# Altium PCB Sensor_Box_PWR_Backup.PCBDOC (part 1 of 2)
Units mil, origin at the board's own origin, x right, y up, seen from the top; angles counter-clockwise.
Board outline 1781.68 x 2876.17 mil, 2 copper layers (Top, Bot), stack 61.855 mil thick; 91 components, 72 nets, 274 pads, 117 vias.
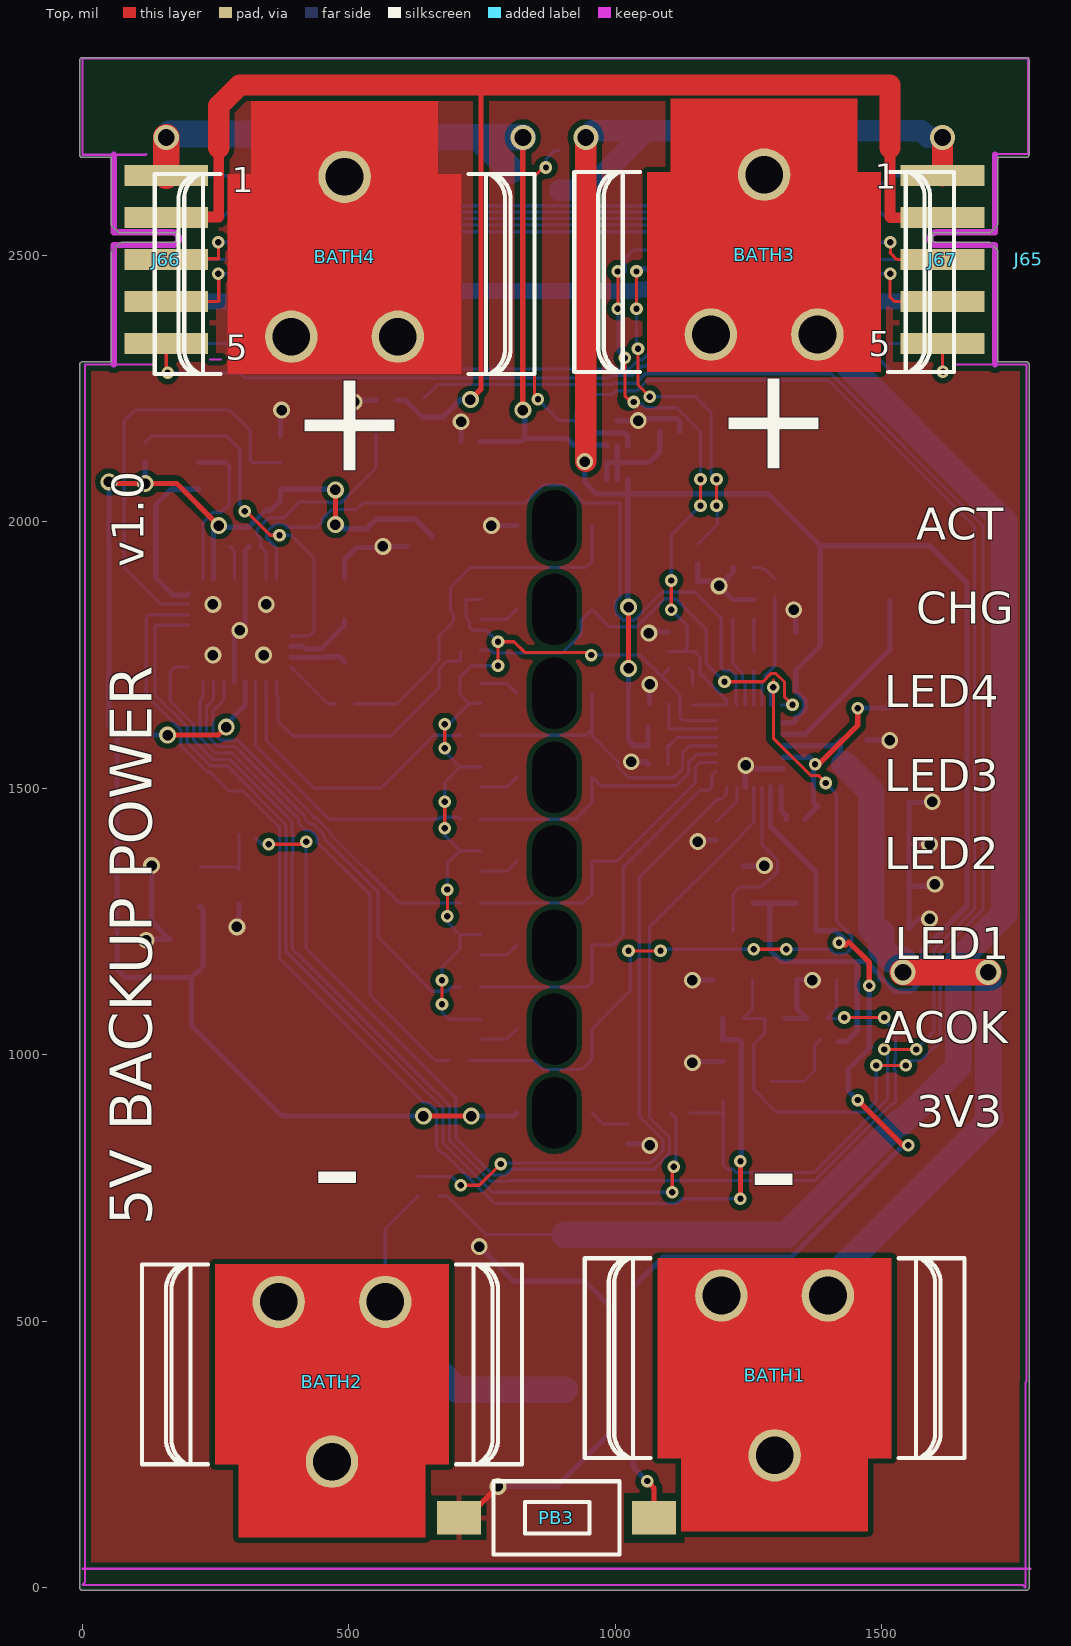
[diagram p0: Top view]
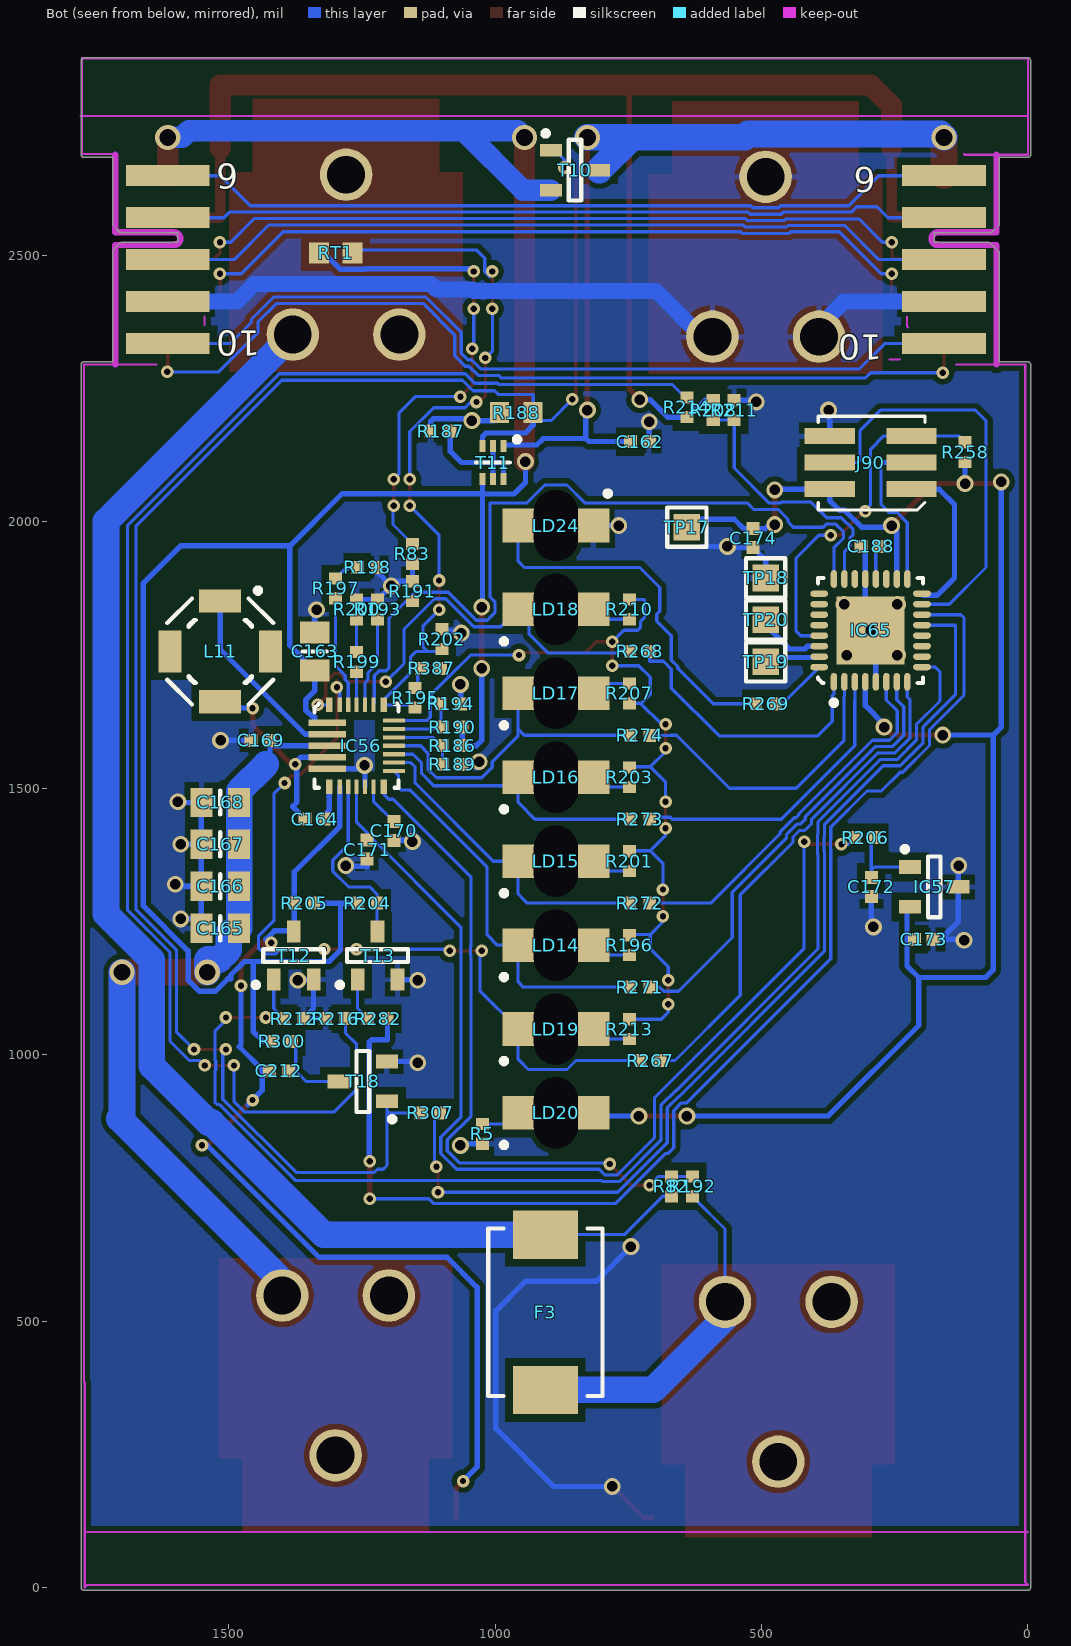
[diagram p1: Bot view, seen from below]
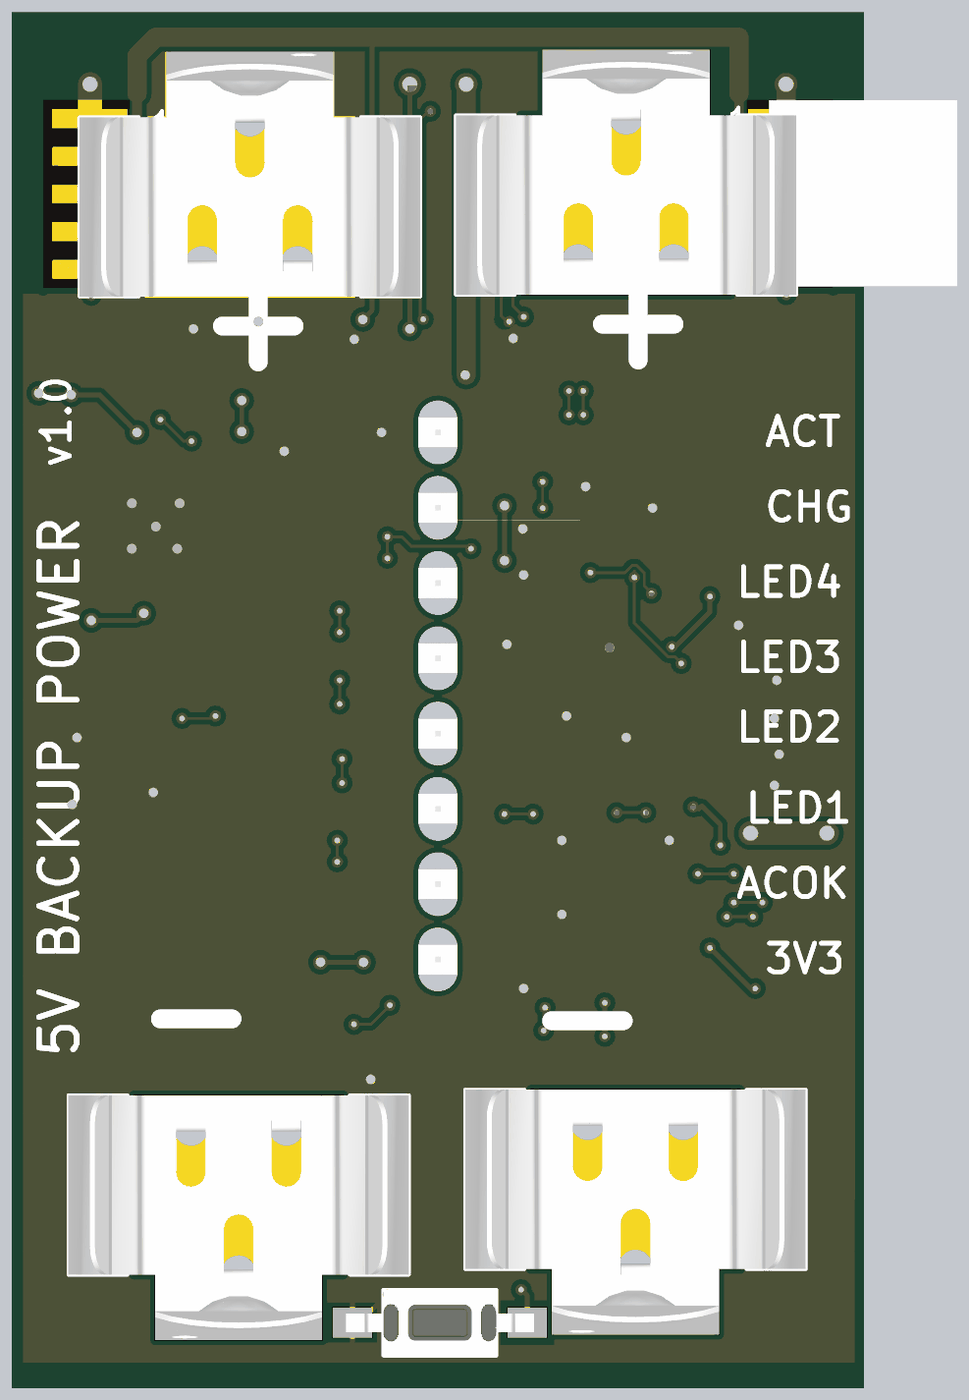
[diagram p2: 3D render of the assembled board from above, using the file's embedded part models]
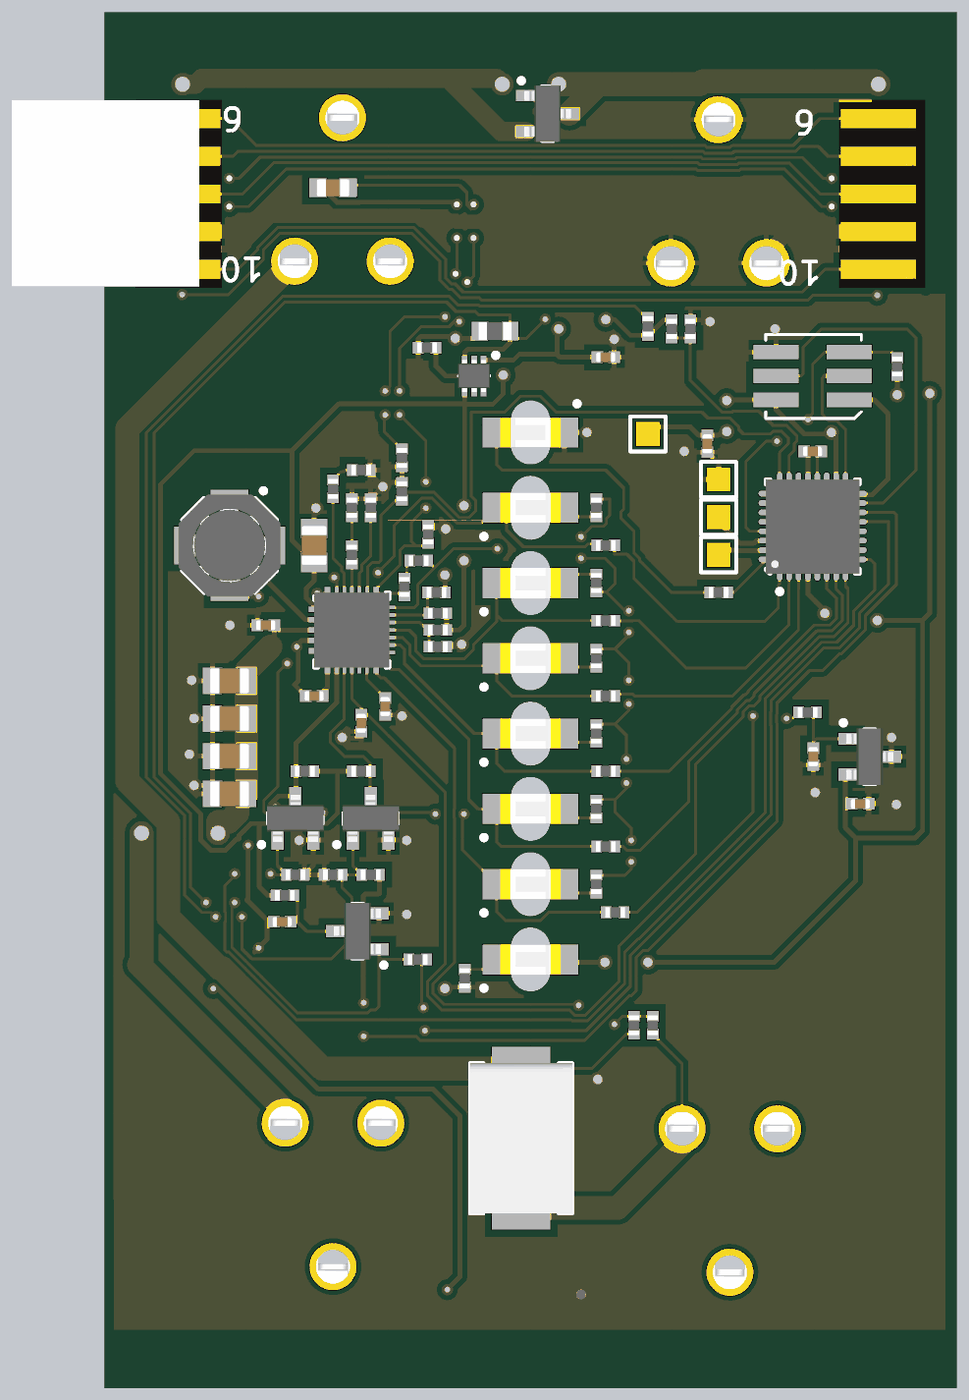
[diagram p3: 3D render of the assembled board from below, using the file's embedded part models]

## Layer stack, top to bottom
TopSolder: solder mask 0.4, Solder Resist, Dk 3.5
Top: signal copper 1.4
Dielectric1: core 59.0551, FR-4, Dk 4.8
Bot: signal copper 1.4
BottomSolder: solder mask 0.4, Solder Resist, Dk 3.5

## Board outline
-5.02,2295.27 cw(c0,2295.27) 0,2300.29 54.04,2300.29 54.04,2503.94 cw(c59.05,2503.94) 55.53,2507.5 55.51,2507.48 71.26,2523.23 71.24,2523.21 cw(c74.8,2519.68) 74.8,2524.7 176.09,2524.7 176.09,2542.23 70.87,2542.23 cw(c70.87,2547.24) 67.3,2543.71 67.32,2543.7 55.51,2555.51 55.53,2555.49 cw(c59.05,2559.05) 54.04,2559.05 54.04,2683.96 0,2683.96 cw(c0,2688.98) -5.02,2688.98 -5.02,2866.14 cw(c0,2866.14) 0.09,2871.15 1771.65,2871.15 cw(c1771.65,2866.14) 1776.67,2866.14 cw(c1771.65,2866.14) 1776.67,2866.06 1776.67,2688.97 cw(c1771.65,2688.97) 1771.65,2683.96 1717.61,2683.96 1717.61,2559.05 cw(c1712.6,2559.05) 1716.13,2555.49 1716.14,2555.51 1704.33,2543.7 1704.35,2543.71 cw(c1700.79,2547.24) 1700.79,2542.23 1595.57,2542.23 1595.57,2524.7 1700.79,2524.7 cw(c1700.79,2519.68) 1704.35,2523.21 1704.33,2523.23 1716.14,2511.42 1716.13,2511.43 cw(c1712.6,2507.87) 1717.61,2507.87 1717.61,2300.29 1771.65,2300.29 cw(c1771.65,2295.27) 1775.2,2298.82 cw(c1771.65,2295.27) 1776.67,2295.27 1776.67,0 cw(c1771.65,0) 1775.43,-3.3 cw(c1771.65,0) 1771.65,-5.02 885.83,-5.02 cw(c885.83,0) 885.74,-5.02 0.04,-5.02 cw(c0,0) -5.02,0

## Design rules (kind name [scope] priority, off if disabled: settings)
Clearance [All] p1: gap=6 ignorepadtopadclearanceinfootprint=FALSE except(10: Arc-Poly Track-Poly THPad-Poly Via-Poly Fill-Poly Poly-Poly Poly-Region Poly-Text Poly-Hole; 15: SMDPad-Poly)
ComponentClearance [All] p1: gap=10 collisioncheckmode=3 verticalgap=0 showdistances=FALSE
DiffPairsRouting [All] p1: maxlimit=10 minlimit=5 mostfreqgap=5 toplayer_minwidth=5 toplayer_maxwidth=15 toplayer_prefwidth=10 bottomlayer_minwidth=5 bottomlayer_maxwidth=15 bottomlayer_prefwidth=10 maxuncoupledlength=500
FabricationTestPointUsage TestPointUsage [All] p1: valid=0 allowmultiple=FALSE
FabricationTestpoint Testpoint [All] p1: side=3 testpointundercomponent=TRUE minsize=40 maxsize=100 preferedsize=60 minholesize=20 maxholesize=40 preferedholesize=32 testpointgrid=1 allowsidetop=TRUE allowsidebottom=TRUE usegrid=TRUE gridtolerance=0.01
HoleSize [All] p1: absolutevalues=TRUE maxlimit=150 minlimit=1 maxpercent=80.000 minpercent=20.000
HoleToHoleClearance [All] p1: gap=1 allowstackedmicrovias=TRUE
MinimumSolderMaskSliver [All] p1: minsoldermaskwidth=0
PlaneClearance [All] p1: clearance=10
PlaneConnect [All] p1: planeconnectstyle=Direct reliefexpansion=20 reliefentries=4 reliefconductorwidth=10 reliefairgap=10
PolygonConnect PolygonConnect_pad [(InPadClass('All Pads'))] p1: connectstyle=Relief reliefconductorwidth=10 reliefentries=4 polygonreliefangle="90 Angle" airgapwidth=10
PolygonConnect [All] p2: connectstyle=Direct reliefconductorwidth=10 reliefentries=4 polygonreliefangle="45 Angle" airgapwidth=10
RoomDefinition Sensor_Box_PWR_Backup [InComponentClass('Sensor_Box_PWR_Backup')] p1 off: confinementstyle=ConfineIn formatcopy=TRUE lockcomponents=FALSE outline 3222.43,601.46 10417.3,601.46 10417.3,1536.49 3222.43,1536.49
RoutingVias RoutingVias_PWR [InNetClass('PWR')] p1: holewidth=31.5 width=47.24 viastyle="Through Hole" minholewidth=19.68 minwidth=31.5 maxholewidth=31.5 maxwidth=47.24
RoutingVias [All] p2: holewidth=11.81 width=23.62 viastyle="Through Hole" minholewidth=11.81 minwidth=23.62 maxholewidth=11.81 maxwidth=23.62
SilkToSilkClearance [All] p1: silktosilkclearance=0
SilkToSolderMaskClearance SilkscreenOverComponentPads [IsPad] p1: minsilkscreentomaskgap=0 clearancetoexposedcopper=TRUE
SolderMaskExpansion [All] p1: expansion=2
Width Width_PWR [InNetClass('PWR')] p1: maxlimit=50 minlimit=10 preferedwidth=20
Width [InNetClass('All Nets')] p2: maxlimit=50 minlimit=6 preferedwidth=10
19 further rules are at their usual default settings.

## Classes and differential pairs
net class PWR: GND P3V3 P5V0i P5V0o P12V0 VH

## Components (designator, comment, footprint, x,y, rotation, side; value= is the part's Value field where it differs from the comment)
BATH1 "=Value" BATH_KEYSTONE_54 1299.21,548.32 r90 top
BATH2 "=Value" BATH_KEYSTONE_54 468.5,536.51 r90 top
BATH3 "=Value" BATH_KEYSTONE_54 1279.53,2351.47 r270 top
BATH4 "=Value" BATH_KEYSTONE_54 492.13,2347.53 r270 top
C162 "100nF" CAPC1005X55N 728.35,2150.68 r180 bottom
C163 "10uF" CAPC2012X135N 1338.58,1756.98 r90 bottom
C164 "100nF" CAPC1005X55N 1338.58,1442.02 r180 bottom
C165 "10uF" CAPC2012X135N 1515.75,1237.3 r0 bottom
C166 "10uF" CAPC2012X135N 1515.75,1316.04 r0 bottom
C167 "10uF" CAPC2012X135N 1515.75,1394.78 r0 bottom
C168 "10uF" CAPC2012X135N 1515.75,1473.52 r0 bottom
C169 "1uF" CAPC1005X55N 1440,1590.01 r0 bottom
C170 "100nF" CAPC1005X55N 1190,1420.01 r270 bottom
C171 "1uF" CAPC1005X55N 1240,1385.01 r270 bottom
C172 "1uF" CAPC1005X55N 293.9,1315.01 r270 bottom
C173 "1uF" CAPC1005X55N 195.48,1216.59 r180 bottom
C174 "100nF" CAPC1005X55N 515.76,1969.6 r90 bottom
C188 "1uF" CAPC1005X55N 295.28,1953.83 r0 bottom
C212 "1uF" CAPC1005X55N 1405.51,969.58 r180 bottom
F3 "3A-6V" FUSR_BOURNS_MF-SM300 905.51,516.83 r270 bottom
IC56 "MP2639AGR" MPS_MP2639AGR 1259.84,1579.82 r180 bottom
IC57 "AP7313-33SAG-7" SOT95P240X130-3N 175.79,1315.01 r180 bottom
IC65 "ATMEGA328PB-MU" QFN50P500X500X100-33N-S325 295.28,1796.35 r90 bottom
J65 "=Family" "AVX_00 9159 010 061 916" 1775.59,2493.2 r180 top
J66 "=Family" EDGE10T1B6_P200W1000L0F100X400 157.48,2649.6 r270 top locked
J67 "=Family" EDGE10T5B10_P200W1000L0F100X400 1614.17,2334.64 r90 top locked
J90 "ZL322-2X3P or PLHTD6S-TR-CV" ZL322-2X3P 295.28,2111.31 r90 bottom
L11 "2.2uH" IND_BOURNS_SRU5028 1515.75,1756.98 r270 bottom
LD14 "Green" LED_KINGBRIGHT_KPTR3216 885.83,1205.8 r0 bottom
LD15 "Green" LED_KINGBRIGHT_KPTR3216 885.83,1363.28 r0 bottom
LD16 "Green" LED_KINGBRIGHT_KPTR3216 885.83,1520.76 r0 bottom
LD17 "Green" LED_KINGBRIGHT_KPTR3216 885.83,1678.24 r0 bottom
LD18 "Green" LED_KINGBRIGHT_KPTR3216 885.83,1835.72 r0 bottom
LD19 "Green" LED_KINGBRIGHT_KPTR3216 885.83,1048.32 r0 bottom
LD20 "Green" LED_KINGBRIGHT_KPTR3216 885.83,890.84 r0 bottom
LD24 "Green" LED_KINGBRIGHT_KPTR3216 885.83,1993.2 r180 bottom
PB3 "Push Button" PB_TYCO_FSMSM 889.76,131 r0 top
R5 "1k" RESC1005X40N 1023.62,851.47 r90 bottom
R82 "49R9" RESC1005X40N 669.29,753.05 r270 bottom
R83 "49R9" RESC1005X40N 1155,1940.01 r270 bottom
R186 "100k" RESC1005X40N 1080,1580.01 r180 bottom
R187 "10k" RESC1005X40N 1102.36,2170.37 r180 bottom
R188 "43k" RESC1608X55N 960,2205 r180 bottom
R189 "30k" RESC1005X40N 1080,1545.01 r0 bottom
R190 "33k" RESC1005X40N 1080,1615.01 r180 bottom
R191 "39k" RESC1005X40N 1155,1870.01 r90 bottom
R192 "49R9" RESC1005X40N 629.92,753.05 r270 bottom
R193 "100k" RESC1005X40N 1220.47,1835.72 r90 bottom
R194 "12k1" RESC1005X40N 1082.68,1658.56 r0 bottom
R195 "2k" RESC1005X40N 1150,1670 r270 bottom
R196 "10k" RESC1005X40N 748.03,1205.8 r270 bottom
R197 "100k" RESC1005X40N 1299.21,1875.09 r90 bottom
R198 "100k" RESC1005X40N 1240.16,1914.46 r180 bottom
R199 "100k" RESC1005X40N 1259.84,1737.3 r90 bottom
R200 "100k" RESC1005X40N 1259.84,1835.72 r90 bottom
R201 "10k" RESC1005X40N 748.03,1363.28 r270 bottom
R202 "6k8" RESC1005X40N 1100,1780 r270 bottom
R203 "10k" RESC1005X40N 748.03,1520.76 r270 bottom
R204 "10k" RESC1005X40N 1240.16,1284.54 r0 bottom
R205 "10k" RESC1005X40N 1358.27,1284.54 r180 bottom
R206 "49R9" RESC1005X40N 305.75,1407.69 r0 bottom
R207 "10k" RESC1005X40N 748.03,1678.24 r90 bottom
R208 "100k" RESC1005X40N 590.55,2209.74 r90 bottom
R210 "10k" RESC1005X40N 748.03,1835.72 r270 bottom
R211 "39k" RESC1005X40N 551.18,2209.74 r270 bottom
R212 "100k" RESC1005X40N 1377.95,1068.01 r0 bottom
R213 "10k" RESC1005X40N 748.03,1048.32 r270 bottom
R214 "100k" RESC1005X40N 640,2215.01 r270 bottom
R216 "39k" RESC1005X40N 1299.21,1068.01 r180 bottom
R258 "10k" RESC1005X40N 118.11,2131 r90 bottom
R267 "10k" RESC1005X40N 708.66,989.27 r0 bottom
R268 "10k" RESC1005X40N 728.35,1756.98 r0 bottom
R269 "10k" RESC1005X40N 492.13,1658.56 r0 bottom
R271 "10k" RESC1005X40N 728.35,1127.06 r0 bottom
R272 "10k" RESC1005X40N 728.35,1284.54 r0 bottom
R273 "10k" RESC1005X40N 728.35,1442.02 r0 bottom
R274 "10k" RESC1005X40N 728.35,1599.5 r0 bottom
R282 "10k" RESC1005X40N 1220.47,1068.01 r0 bottom
R300 "100k" RESC1005X40N 1400,1025.01 r0 bottom
R307 "10k" RESC1005X40N 1122.05,890.84 r0 bottom
R387 "220" RESC1005X40N 1120,1725 r180 bottom
RT1 "10k" THERMC1608X90N 1299.21,2505.01 r180 bottom
T10 "Si2315BDS-T1-E3" SOT95P237X112-3N 850,2660.01 r180 bottom
T11 "BC857BV" SOTFL50P160X60-6N 1003.94,2111.31 r270 bottom
T12 "BSS138LT1G" SOT95P240X110-3N 1377.95,1186.12 r90 bottom
T13 "BSS138LT1G" SOT95P240X110-3N 1220.47,1186.12 r90 bottom
T18 "BSS138LT1G" SOT95P240X110-3N 1248.03,949.9 r0 bottom
TP17 "Test Point" TPS127 640,1990 r90 bottom
TP18 "Test Point" TPS127 492.13,1894.78 r90 bottom
TP19 "Test Point" TPS127 492.13,1737.3 r90 bottom
TP20 "Test Point" TPS127 492.13,1816.04 r90 bottom

## Footprints (in the part's own frame and the unit in brackets; to place one, negate y for a bottom-side part, rotate by r counter-clockwise, add the part's x,y. Pads: shape width x height; smd on the part's side, far side on the other; paste and mask are expansions set on the pad)
"AVX_00 9159 010 061 916" [mil] "10 Contacts, 2mm Pitch, Open Ended Card Edge Connector, 9159 Series"
  body extent -197,-195 197,195, height 67
BATH_KEYSTONE_54 [mm] "Clip for 16mm - 19mm Diameter Battery"
  round 2.5 hole 1.8: 1(-7.62,0) 1(0,2.54) 1(0,-2.54)
  Top region: -11.231,-4.445 -11.231,4.445 -7.747,4.445 -7.747,5.563 1.778,5.563 1.778,-5.563 -7.747,-5.563 -7.747,-4.445
  silkscreen extent -7.75,-9.05 1.78,9.05, body extent -11.23,-9.05 1.78,9.05, height 18.3
CAPC1005X55N [mm] "Chip Capacitor, Body 1.0x0.55mm, IPC Medium Density"
  rect 0.62x0.62 smd: 1(-0.45,0) 2(0.45,0)
  body extent -0.52,-0.27 0.53,0.28, height 0.55
CAPC2012X135N [mm] "Chip Capacitor, Body 2.0x1.25mm, IPC Medium Density"
  rect 1.05x1.4 smd: 1(-0.9,0) 2(0.9,0)
  silkscreen extent 0,-0.58 0,0.58, body extent -1.05,-0.67 1.05,0.68, height 1.25
EDGE10T1B6_P200W1000L0F100X400 [mm] "10 contacts Board Edge Connector, First Left Top Pad 1, First Left Bottom Pad 2, Pitch 2mm, Length 0mm, Width 10mm, Finger Lenght 4mm, Finger Width 1mm"
  rect 1x4 smd paste-0.5: 1(0,0) 2(2,0) 3(4,0) 4(6,0) 5(8,0)
  rect 1x4 smd far side paste-0.5: 6(0,0) 7(2,0) 8(4,0) 9(6,0) 10(8,0)
  KeepOutLayer lines w0.3: 9,-2.5 3.3,-2.5 3.3,0.3 ccw(c3,0.3) 2.7,0.3 2.7,-2.5 -1,-2.5
EDGE10T5B10_P200W1000L0F100X400 [mm] "10 contacts Board Edge Connector, First Left Top Pad 5, First Left Bottom Pad 10, Pitch 2mm, Length 0mm, Width 10mm, Finger Lenght 4mm, Finger Width 1mm"
  rect 1x4 smd paste-0.5: 1(8,0) 2(6,0) 3(4,0) 4(2,0) 5(0,0)
  rect 1x4 smd far side paste-0.5: 6(8,0) 7(6,0) 8(4,0) 9(2,0) 10(0,0)
  KeepOutLayer lines w0.3: -1,-2.5 4.7,-2.5 4.7,0.3 cw(c5,0.3) 5.3,0.3 5.3,-2.5 9,-2.5
FUSR_BOURNS_MF-SM300 [mm] "PolySwitch, 2-Leads, Body 7.98x5.44mm Max"
  rect 2.3x3.1 smd: 1(-3.7,0) 2(3.7,0)
  silkscreen extent -3.99,-2.72 3.99,2.72, body extent -3.99,-2.72 3.99,2.72, height 3
IND_BOURNS_SRU5028 [mm] "SMD Inductor Body Width 5.4mm Body Lenght 5.4mm Height 3mm"
  rect 1.1x2 smd: 1(-2.4,0) 2(2.4,0)
  rect 2x1.1 smd: 3(0,2.4) 4(0,-2.4)
  silkscreen extent -3.02,-2.53 2.53,2.53, body extent -2.7,-2.7 2.7,2.7, height 2.8
LED_KINGBRIGHT_KPTR3216 [mm] "Reverse Mount LED 3216, Hole 2.1x2.3mm 0.35mm Height"
  rect 1.5x1.6 smd: 1(1.8,0) 2(-1.8,0)
  oval 1.9x3.2 hole 2.1 slot 3.4 at 90 deg unplated mask+0.1: 3(0,0)
  silkscreen extent 2.35,1.4 2.6,1.65, body extent -1.6,-0.8 1.6,0.8, height 0.25
MPS_MP2639AGR [mm] "MPS QFN-26 (4mmx4mm) Case"
  rect 1.8x0.3 smd: 1(-1.4,1.1) 2(-1.4,0.55) 3(-1.4,0) 4(-1.4,-0.55) 5(-1.4,-1.1)
  rect 0.3x0.7 smd: 6(-1.3,-1.95) 12(1.3,-1.95) 20(1.3,1.95) 26(-1.3,1.95)
  rect 0.2x0.7 smd: 7(-0.8,-1.95) 8(-0.4,-1.95) 9(0,-1.95) 10(0.4,-1.95) 11(0.8,-1.95) 21(0.8,1.95) 22(0.4,1.95) 23(0,1.95) 24(-0.4,1.95) 25(-0.8,1.95)
  rect 1.05x0.2 smd: 13(1.775,-1.2) 14(1.775,-0.8) 15(1.775,-0.4) 16(1.775,0) 17(1.775,0.4) 18(1.775,0.8) 19(1.775,1.2)
  silkscreen extent -2,-2 2,2, body extent -2,-2 2,2, height 1.05
PB_TYCO_FSMSM [mm] "Body 3.5x6.0mm, Pushbutton Switch,  TYCO FSMSM Serie"
  rect 2.1x1.6 smd: 1(-4.65,0) 2(4.65,0)
  silkscreen extent -3,-1.75 3,1.75, body extent -5,-1.75 5,1.75, height 4.3
QFN50P500X500X100-33N-S325 [mm] "QFN, (MO-220-VHHD-4) 0.50mm pitch,square; 8 pin X 8 pin, 5mm X 5mm X 1.00mm H body (w/thermal tab 3.25 X 3.25mm),  IPC Medium Density"
  oval 0.85x0.3 smd: 1(-2.45,1.75) 2(-2.45,1.25) 3(-2.45,0.75) 4(-2.45,0.25) 5(-2.45,-0.25) 6(-2.45,-0.75) 7(-2.45,-1.25) 8(-2.45,-1.75) 17(2.45,-1.75) 18(2.45,-1.25) 19(2.45,-0.75) 20(2.45,-0.25) 21(2.45,0.25) 22(2.45,0.75) 23(2.45,1.25) 24(2.45,1.75)
  oval 0.3x0.85 smd: 9(-1.75,-2.45) 10(-1.25,-2.45) 11(-0.75,-2.45) 12(-0.25,-2.45) 13(0.25,-2.45) 14(0.75,-2.45) 15(1.25,-2.45) 16(1.75,-2.45) 25(1.75,2.45) 26(1.25,2.45) 27(0.75,2.45) 28(0.25,2.45) 29(-0.25,2.45) 30(-0.75,2.45) 31(-1.25,2.45) 32(-1.75,2.45)
  rect 3.25x3.25 smd: 33(0,0)
  silkscreen extent -3.57,-2.5 2.5,2.5, body extent -2.5,-2.5 2.5,2.5, height 1
RESC1005X40N [mm] "Chip Resistor, EIA 0402, Metric 1005, Body 1.0x0.5mm, IPC Medium Density"
  rect 0.58x0.62 smd: 1(-0.47,0) 2(0.47,0)
  body extent -0.52,-0.27 0.53,0.28, height 0.4
RESC1608X55N [mm] "Chip Resistor, EIA 0603, Metric 1608, Body 1.6x0.8mm, IPC Medium Density"
  rect 0.9x1 smd: 1(-0.8,0) 2(0.8,0)
  body extent -0.87,-0.47 0.88,0.48, height 0.55
SOT95P237X112-3N [mm] "SOT, 0.95mm, pitch; 3 pin,1.30mm W X 2.92mm L X 1.12mm H body, IPC Medium Density"
  rect 1.05x0.6 smd: 1(-1.15,0.95) 2(-1.15,-0.95) 3(1.15,0)
  silkscreen extent -1.53,-1.45 0.3,1.87, body extent -1.25,-1.5 1.25,1.5, height 1.1
SOT95P240X110-3N [mm] "SOT23 3-Leads, Pitch 0.95mm, Body 1.3x2.9mm, IPC Medium Density"
  rect 1.05x0.65 smd: 1(-1.15,0.95) 2(-1.15,-0.95) 3(1.15,0)
  silkscreen extent -1.52,-1.45 0.3,1.92, body extent -1.25,-1.5 1.25,1.5, height 1.1
SOT95P240X130-3N [mm] "SOT23 3-Leads, Pitch 0.95mm - Body 1.3x2.9mm, IPC Medium Density"
  rect 1.05x0.65 smd: 1(-1.15,0.95) 2(-1.15,-0.95) 3(1.15,0)
  silkscreen extent -1.53,-1.45 0.3,1.92, body extent -1.25,-1.5 1.25,1.5, height 1.3
SOTFL50P160X60-6N [mm] "SOTFL (SOT666), 0.50mm, Pitch; 6 Pin, 1.20mm W X 1.60mm L X 0.60mm H Body, IPC Medium Density"
  rect 0.57x0.3 smd: 1(-0.79,0.5) 2(-0.79,0) 3(-0.79,-0.5) 4(0.79,-0.5) 5(0.79,0) 6(0.79,0.5)
  silkscreen extent -1.22,-0.8 0,1.27, body extent -0.85,-0.85 0.85,0.85, height 0.6
THERMC1608X90N [mm] "PTC Thermistors, Chip; 1.6mm L X 0.8mm W X 0.9mm H, IPC Medium Density"
  rect 0.95x1 smd: 1(-0.8,0) 2(0.8,0)
  body extent -0.87,-0.47 0.88,0.48, height 0.9
TPS127 [mil] "1.27 x  1.27mm SMD Test Point Area"
  rect 50x50 smd paste-50: 1(0,0)
  silkscreen extent -37,-37 37,37
ZL322-2X3P [mm] "SMT 1.27 mm dual goldpin"
  rect 0.76x2.4 smd: 1(-1.27,-1.95) 2(-1.27,1.95) 3(0,-1.95) 4(0,1.95) 5(1.27,-1.95) 6(1.27,1.95)
  silkscreen extent -2.25,-2.58 2.2,2.5, body extent -2.05,-2.15 2.03,2.15, height 4.5

## Part data
BATH1 BATH2 BATH3 BATH4: library part BATH_KEYSTONE_54, "Battery Holder whit 1 Pin", Manufacturer=KEYSTONE, Manufacturer Part Number=54, Author="CERN DEM JLC", ComponentHeight=16.59mm, Component Type=Standard, CreateDate=21.03.2018, Family=Battery, HelpURL=\\cern.ch\dfs\Applications\Altium\Datasheets\BATH_KEYSTONE_54.pdf, LatestRevisionDate=21.03.2018, Mounted=Yes, PackageDescription="Clip for 16mm - 19mm Diameter Battery", Part Description="Clip for 16mm - 19mm Diameter Battery", Part Number=BATH_KEYSTONE_54, Pin Count=1, PressFit=No, Sense=No, SMD=No, Socket=No
C162 C164 C170 C174: library part CC0402_100NF_16V_10%_X5R, "Non-polarised capacitor", Case=0402, Manufacturer=GENERIC, Manufacturer1 ComponentHeight=0.55mm, Manufacturer1 Example=MURATA, Manufacturer1 Part Number=GRM155R61C104KA88D, Tolerance=±10%, Voltage=16V, Author="CERN DEM JLC", Component Type=Standard, CreateDate=10.12.2013, HelpURL=\\cern.ch\dfs\Applications\Altium\Datasheets\CC0402_X5R_MURATA_GRM.pdf, LatestRevisionDate=10.12.2013, Manufacturer Part Number=CC0402_100NF_16V_10%_X5R, Mounted=Yes, Part Description="SMD Multilayer Chip Ceramic Capacitor", Part Number=CC0402_100NF_16V_10%_X5R, Pin Count=2, Sense=No, SMD=Yes, Socket=No, Status=None, TC=X5R
C163 C165 C166 C167 C168: library part CC0805_10UF_16V_10%_X5R, "Non-polarised capacitor", Case=0805, Manufacturer=GENERIC, Manufacturer1 ComponentHeight=1.4mm, Manufacturer1 Example=KEMET, Manufacturer1 Part Number=C0805C106K4PAC, Tolerance=±10%, Voltage=16V, Author="CERN DEM JLC", Component Type=Standard, CreateDate=03.12.2007, HelpURL=\\cern.ch\dfs\Applications\Altium\Datasheets\CC1206_X5R_KEMET.pdf, LatestRevisionDate=03.12.2007, Manufacturer Part Number=CC0805_10UF_16V_10%_X5R, Mounted=Yes, Part Description="SMD Multilayer Chip Ceramic Capacitor", Part Number=CC0805_10UF_16V_10%_X5R, Pin Count=2, Sense=No, SMD=Yes, Socket=No, Status=Preferred, TC=X5R
C169 C171 C172 C173 C188 C212: library part CC0402_1UF_16V_10%_X5R, "Non-polarised capacitor", Case=0402, Manufacturer=GENERIC, Manufacturer1 ComponentHeight=0.55mm, Manufacturer1 Example=TDK, Manufacturer1 Part Number=C1005X5R1C105KT, Tolerance=±10%, Voltage=16V, Author="CERN DEM JLC", Component Type=Standard, CreateDate=25.10.2012, HelpURL=\\cern.ch\dfs\Applications\Altium\Datasheets\CC0402_X5R_TDK_C.pdf, LatestRevisionDate=25.10.2012, Manufacturer Part Number=CC0402_1UF_16V_10%_X5R, Mounted=Yes, Part Description="SMD Multilayer Chip Ceramic Capacitor", Part Number=CC0402_1UF_16V_10%_X5R, Pin Count=2, Sense=No, SMD=Yes, Socket=No, Status=Preferred, TC=X5R
F3: library part FUSR_BOURNS_MF-SM300-2, "Fuse", Manufacturer=BOURNS, Manufacturer Part Number=MF-SM300-2, Author="CERN DEM JLC", ComponentHeight=3mm, Component Type=Standard, CreateDate=15.08.2013, Family="Fuses Resettable", HelpURL=\\cern.ch\dfs\Applications\Altium\Datasheets\FUSR_BOURNS_MF-SM300-2.pdf, LatestRevisionDate=15.08.2013, Mounted=Yes, PackageDescription="PolySwitch, 2-Leads, Body 7.35x5.12mm Nominal", Part Description="PTC Resettable Fuse", Part Number=FUSR_BOURNS_MF-SM300-2, Pin Count=2, PressFit=No, Sense=No, SMD=Yes, Socket=No
IC56: "2-Cell Li-Ion or Li-Polymer Switching Charger Compatible with 5V Input and Integrated, Bidirectional Charge/Discharge", Case=QFN26, Manufacturer="MPS (MONOLITIC  POWER SYSTEMS)", Author="CERN DEM JLC", Bonding=No, ComponentHeight=1mm, Component Type=Standard, CreateDate=21.03.2018, Device=MP2639AGR, HelpURL=\\cern.ch\dfs\Applications\Altium\Datasheets\MP2639AGR.pdf, LatestRevisionDate=21.03.2018, Manufacturer Part Number=MP2639AGR, Mounted=Yes, PackageDescription="MPS QFN-26 (4mmx4mm) Case", Part Description="2-Cell Li-Ion or Li-Polymer Switching Charger Compatible with 5V Input and Integrated, Bidirectional Charge/Discharge", Part Number=MP2639AGR, Pin Count=26, PressFit=No, Sense=No, SMD=Yes, Socket=No
IC57: "3-Terminal Regulator 1=IN 2=OUT 3=GND", Case=SOT23, Manufacturer="DIODES INCORPORATED", Author="CERN DEM JLC", Bonding=No, ComponentHeight=1.35mm, Component Type=Standard, CreateDate=20.03.2018, Device=AP7313-33SAG-7, HelpURL=\\cern.ch\dfs\Applications\Altium\Datasheets\AP7313-33SAG-7.pdf, LatestRevisionDate=20.03.2018, Manufacturer Part Number=AP7313-33SAG-7, Mounted=Yes, PackageDescription="SOT23 3-Leads, Pitch 0.95mm - Body 1.3x2.9mm, IPC Medium Density", Part Description="3.3V, 150mA Low Quiescent Current, Fast Transient Low Dropout Linear Regulator", Part Number=AP7313-33SAG-7, Pin Count=3, PressFit=No, Sense=No, SMD=Yes, Socket=No
IC65: "8-bit AVR 20MHz Microcontroller With 32K Bytes In-System  Programmable  Flash", Case=QFN32, Manufacturer=ATMEL, Author=GK, Bonding=No, ComponentHeight=1mm, Component Type=Standard, CreateDate=2011-02-08, Device=ATMEGA328PB-MU, HelpURL=\\cern.ch\dfs\Applications\Altium\Datasheets\ATMEGA328P-MU.pdf, LatestRevisionDate=2014-07-02, Manufacturer Part Number=ATMEGA328PB-MU, Mounted=Yes, PackageDescription="QFN, (MO-220-VHHD-2) 0.50mm pitch,square; 8 pin X 8 pin, 5mm X 5mm X 1.00mm H body (w/thermal tab 3.25 X 3.25mm),  IPC Medium Density", Part Description="8-bit AVR Microcontroller, 32KB Flash, 1KB EEPROM, 2KB SRAM, 32-pin MLF, Industrial Grade (-40°C to 85°C)", Part Number=ATMEGA328PB-MU, Pin Count=33, PressFit=No, Sense=No, SMD=Yes, Socket=No
J65: library part "AVX_00 9159 010 061 916", "Open Ended Card Edge Connector, 9159 Series", Manufacturer=AVX, Manufacturer Part Number="00 9159 010 061 916", Author="CERN DEM MR", ComponentHeight=1.6mm, Component Type=Standard, CreateDate=13.02.2018, HelpURL="\\cern.ch\dfs\Applications\Altium\Datasheets\AVX_00 9159 010 061 916.pdf", LatestRevisionDate=13.02.2018, Mounted=Yes, Part Description="10 Contacts, 2mm Pitch, Open Ended Card Edge Connector, 9159 Series", Part Number="AVX_00 9159 010 061 916", Pin Count=10, PressFit=No, Sense=No, SMD=No, Socket=No, Status=None
J66: library part EDGE10T1B6_P200W1000L0F100X400, "PCB Edge Connector 10 (2x5)", Author="CERN DEM MR", ComponentHeight=0mm, Component Type="Standard (No BOM)", CreateDate=14.02.2018, HelpURL=\\cern.ch\dfs\Applications\Altium\Datasheets\EDGE10T1B6_P200W1000L0F100X400.pdf, LatestRevisionDate=14.02.2018, Mounted=No, Part Description="10 Contacts Board Edge Connector, Pitch 2mm, Length 0mm, Width 10mm, Finger Lenght 4mm, Finger Width 1mm", Part Number=EDGE10T1B6_P200W1000L0F100X400, Pin Count=10, PressFit=No, Sense=No, SMD=No, Socket=No, Status=None
J67: library part EDGE10T5B10_P200W1000L0F100X400, "PCB Edge Connector 10 (2x5)", Author="CERN DEM MR", ComponentHeight=0mm, Component Type="Standard (No BOM)", CreateDate=14.02.2018, HelpURL=\\cern.ch\dfs\Applications\Altium\Datasheets\EDGE10T5B10_P200W1000L0F100X400.pdf, LatestRevisionDate=14.02.2018, Mounted=No, Part Description="10 Contacts Board Edge Connector, Pitch 2mm, Length 0mm, Width 10mm, Finger Lenght 4mm, Finger Width 1mm", Part Number=EDGE10T5B10_P200W1000L0F100X400, Pin Count=10, PressFit=No, Sense=No, SMD=No, Socket=No, Status=None
J90: library part "CON_2x3 1.27 SMT Male", "1.27 mm dual row goldpin (Maritex)"
L11: library part IND_2.2UH_30%_BOURNS_SRU5028, "Inductor With Core", Manufacturer=BOURNS, Manufacturer Part Number=SRU5028-2R2Y, Power=3.2A, Resistance=0.021R, Tolerance=±30%, Author="CERN DEM BC", ComponentHeight=3mm, Component Type=Standard, CreateDate=02.09.2015, HelpURL=\\cern.ch\dfs\Applications\Altium\Datasheets\IND_BOURNS_SRU5028.pdf, LatestRevisionDate=02.09.2015, Mounted=Yes, Part Description="Shielded SMD Power Inductor", Part Number=IND_2.2UH_30%_BOURNS_SRU5028, Pin Count=2, Sense=No, SMD=Yes, Socket=No, Status=None
LD14 LD15 LD16 LD17 LD18 LD19 LD20 LD24: library part LED_KINGBRIGHT_KPTR-3216CGCK, "LED Green 1A 2C", Manufacturer=KINGBRIGHT, Manufacturer Part Number=KPTR-3216CGCK, Author="CERN DEM MR", Bonding=No, Color=Green, ComponentHeight=0.35mm, Component Type=Standard, CreateDate=15.02.2016, HelpURL=\\cern.ch\dfs\Applications\Altium\Datasheets\LED_KINGBRIGHT_KPTR-3216CGCK.pdf, LatestRevisionDate=15.02.2016, Mounted=Yes, PackageDescription="Reverse Mount LED 3216, Hole 2.1x2.3mm 0.35mm Height", Part Description="Reverse Mount LED 1.4x1.6mm Green", Part Number=LED_KINGBRIGHT_KPTR-3216CGCK, Pin Count=2, PressFit=No, Sense=No, SMD=Yes, Socket=No
PB3: library part PB_TYCO_FSMSM, "Push-Button Switch SPDT", Manufacturer="TYCO ELECTRONICS", Manufacturer Part Number="FSMSM or 1437566-3", Author="CERN DEM JLC", ComponentHeight=4.3mm, Component Type=Standard, CreateDate=30.06.2008, Family="Push Button", HelpURL=\\cern.ch\dfs\Applications\Altium\Datasheets\PB_TYCO_FSMSM.pdf, LatestRevisionDate=21.06.2012, Mounted=Yes, PackageDescription="Body 3.5x6.0mm, Pushbutton Switch,  TYCO ALCOSWITCH FSMSM Serie", Part Description="12VDC 50mA SPST Tactile  Push-Button Switch", Part Number=PB_TYCO_FSMSM, Pin Count=2, PressFit=No, Sense=No, SMD=Yes, Socket=No, Status=None
R5: library part R0402_1K_1%_0.0625W_100PPM, "Resistor - 1%", Case=0402, Manufacturer=GENERIC, Manufacturer1 ComponentHeight=0.4mm, Manufacturer1 Example="YAGEO PHYCOMP", Manufacturer1 Part Number=232270671002L, Power=0.0625W, Tolerance=±1%, Author="CERN DEM JLC", Component Type=Standard, CreateDate=03.12.2007, HelpURL=\\cern.ch\dfs\Applications\Altium\Datasheets\R0402_Phycomp_RC0402.pdf, LatestRevisionDate=17.10.2012, Manufacturer Part Number=R0402_1K_1%_0.0625W_100PPM, Mounted=Yes, Part Description="General Purpose Thick Film Chip Resistor", Part Number=R0402_1K_1%_0.0625W_100PPM, Pin Count=2, PressFit=No, Sense=No, SMD=Yes, Socket=No, Status="Not Recommended", TC=±100ppm/°C
R82 R83 R192 R206: library part R0402_49R9_1%_0.0625W_100PPM, "Resistor - 1%", Case=0402, Manufacturer=GENERIC, Manufacturer1 ComponentHeight=0.4mm, Manufacturer1 Example="YAGEO PHYCOMP", Manufacturer1 Part Number="232270674999L or RC0402FR-0749R9L", Power=0.0625W, Tolerance=±1%, Author="CERN DEM JLC", Component Type=Standard, CreateDate=2012-10-24, HelpURL=\\cern.ch\dfs\Applications\Altium\Datasheets\R0402_Phycomp_RC0402.pdf, LatestRevisionDate=2012-10-24, Manufacturer Part Number=R0402_49R9_1%_0.0625W_100PPM, Mounted=Yes, Part Description="General Purpose Thick Film Chip Resistor", Part Number=R0402_49R9_1%_0.0625W_100PPM, Pin Count=2, SMD=Yes, Socket=No, Status="Not recommended", Table="Resistors SMD", TC=±100ppm/°C
R186 R193 R197 R198 R199 R200 R208 R212 R214 R300: library part R0402_100K_1%_0.0625W_100PPM, "Resistor - 1%", Case=0402, Manufacturer=GENERIC, Manufacturer1 ComponentHeight=0.4mm, Manufacturer1 Example="YAGEO PHYCOMP", Manufacturer1 Part Number=232270671004L, Power=0.0625W, Tolerance=±1%, Author="CERN DEM JLC", Component Type=Standard, CreateDate=03.12.2007, HelpURL=\\cern.ch\dfs\Applications\Altium\Datasheets\R0402_Phycomp_RC0402.pdf, LatestRevisionDate=17.10.2012, Manufacturer Part Number=R0402_100K_1%_0.0625W_100PPM, Mounted=Yes, Part Description="General Purpose Thick Film Chip Resistor", Part Number=R0402_100K_1%_0.0625W_100PPM, Pin Count=2, PressFit=No, Sense=No, SMD=Yes, Socket=No, Status="Not Recommended", TC=±100ppm/°C
R187 R196 R201 R203 R204 R205 R207 R210 R213 R258 R267 R268 R269 R271 R272 R273 R274 R282 R307: library part R0402_10K_1%_0.0625W_100PPM, "Resistor - 1%", Case=0402, Manufacturer=GENERIC, Manufacturer1 ComponentHeight=0.4mm, Manufacturer1 Example="YAGEO PHYCOMP", Manufacturer1 Part Number=232270671003L, Power=0.0625W, Tolerance=±1%, Author="CERN DEM JLC", Component Type=Standard, CreateDate=03.12.2007, HelpURL=\\cern.ch\dfs\Applications\Altium\Datasheets\R0402_Phycomp_RC0402.pdf, LatestRevisionDate=17.10.2012, Manufacturer Part Number=R0402_10K_1%_0.0625W_100PPM, Mounted=Yes, Part Description="General Purpose Thick Film Chip Resistor", Part Number=R0402_10K_1%_0.0625W_100PPM, Pin Count=2, PressFit=No, Sense=No, SMD=Yes, Socket=No, Status="Not Recommended", TC=±100ppm/°C
R188: library part R0603_43K_1%_0.1W_100PPM, "Resistor - 1%", Case=0603, Manufacturer=GENERIC, Manufacturer1 ComponentHeight=0.55mm, Manufacturer1 Example="NIC COMPONENT", Manufacturer1 Part Number=NRC06F4302TRF, Power=0.1W, Tolerance=±1%, Author="CERN DEM JLC", Component Type=Standard, CreateDate=03.12.2007, HelpURL=\\cern.ch\dfs\Applications\Altium\Datasheets\R0603_NIC_NRC.pdf, LatestRevisionDate=13.03.2008, Manufacturer Part Number=R0603_43K_1%_0.1W_100PPM, Mounted=Yes, Part Description="General Purpose Thick Film Chip Resistor", Part Number=R0603_43K_1%_0.1W_100PPM, Pin Count=2, PressFit=No, Sense=No, SMD=Yes, Socket=No, Status=Preferred, TC=±100ppm/°C
R189: library part R0402_30K_1%_0.0625W_100PPM, "Resistor - 1%", Case=0402, Manufacturer=GENERIC, Manufacturer1 ComponentHeight=0.4mm, Manufacturer1 Example="YAGEO PHYCOMP", Manufacturer1 Part Number=232270673003L, Power=0.0625W, Tolerance=±1%, Author="CERN DEM JLC", Component Type=Standard, CreateDate=03.12.2007, HelpURL=\\cern.ch\dfs\Applications\Altium\Datasheets\R0402_Phycomp_RC0402.pdf, LatestRevisionDate=17.10.2012, Manufacturer Part Number=R0402_30K_1%_0.0625W_100PPM, Mounted=Yes, Part Description="General Purpose Thick Film Chip Resistor", Part Number=R0402_30K_1%_0.0625W_100PPM, Pin Count=2, PressFit=No, Sense=No, SMD=Yes, Socket=No, Status="Not Recommended", TC=±100ppm/°C
R190: library part R0402_33K_1%_0.0625W_100PPM, "Resistor - 1%", Case=0402, Manufacturer=GENERIC, Manufacturer1 ComponentHeight=0.4mm, Manufacturer1 Example="YAGEO PHYCOMP", Manufacturer1 Part Number=232270673303L, Power=0.0625W, Tolerance=±1%, Author="CERN DEM JLC", Component Type=Standard, CreateDate=03.12.2007, HelpURL=\\cern.ch\dfs\Applications\Altium\Datasheets\R0402_Phycomp_RC0402.pdf, LatestRevisionDate=17.10.2012, Manufacturer Part Number=R0402_33K_1%_0.0625W_100PPM, Mounted=Yes, Part Description="General Purpose Thick Film Chip Resistor", Part Number=R0402_33K_1%_0.0625W_100PPM, Pin Count=2, PressFit=No, Sense=No, SMD=Yes, Socket=No, Status="Not Recommended", TC=±100ppm/°C
R191 R211 R216: library part R0402_39K_1%_0.0625W_100PPM, "Resistor - 1%", Case=0402, Manufacturer=GENERIC, Manufacturer1 ComponentHeight=0.4mm, Manufacturer1 Example="YAGEO PHYCOMP", Manufacturer1 Part Number=232270673903, Power=0.0625W, Tolerance=±1%, Author="CERN DEM JLC", Component Type=Standard, CreateDate=03.12.2007, HelpURL=\\cern.ch\dfs\Applications\Altium\Datasheets\R0402_Phycomp_RC0402.pdf, LatestRevisionDate=17.10.2012, Manufacturer Part Number=R0402_39K_1%_0.0625W_100PPM, Mounted=Yes, Part Description="General Purpose Thick Film Chip Resistor", Part Number=R0402_39K_1%_0.0625W_100PPM, Pin Count=2, PressFit=No, Sense=No, SMD=Yes, Socket=No, Status="Not Recommended", TC=±100ppm/°C
R194: library part R0402_12K1_1%_0.0625W_100PPM, "Resistor - 1%", Case=0402, Manufacturer=GENERIC, Manufacturer1 ComponentHeight=0.4mm, Manufacturer1 Example="YAGEO PHYCOMP", Manufacturer1 Part Number="232270671213L or RC0402FR-0712K1L", Power=0.0625W, Tolerance=±1%, Author="CERN DEM JLC", Component Type=Standard, CreateDate=24.10.2012, HelpURL=\\cern.ch\dfs\Applications\Altium\Datasheets\R0402_Phycomp_RC0402.pdf, LatestRevisionDate=24.10.2012, Manufacturer Part Number=R0402_12K1_1%_0.0625W_100PPM, Mounted=Yes, Part Description="General Purpose Thick Film Chip Resistor", Part Number=R0402_12K1_1%_0.0625W_100PPM, Pin Count=2, PressFit=No, Sense=No, SMD=Yes, Socket=No, Status="Not Recommended", TC=±100ppm/°C
R195: library part R0402_2K_1%_0.0625W_100PPM, "Resistor - 1%", Case=0402, Manufacturer=GENERIC, Manufacturer1 ComponentHeight=0.4mm, Manufacturer1 Example="YAGEO PHYCOMP", Manufacturer1 Part Number=232270672002L, Power=0.0625W, Tolerance=±1%, Author="CERN DEM JLC", Component Type=Standard, CreateDate=03.12.2007, HelpURL=\\cern.ch\dfs\Applications\Altium\Datasheets\R0402_Phycomp_RC0402.pdf, LatestRevisionDate=17.10.2012, Manufacturer Part Number=R0402_2K_1%_0.0625W_100PPM, Mounted=Yes, Part Description="General Purpose Thick Film Chip Resistor", Part Number=R0402_2K_1%_0.0625W_100PPM, Pin Count=2, PressFit=No, Sense=No, SMD=Yes, Socket=No, Status="Not Recommended", TC=±100ppm/°C
R202: library part R0402_6K8_1%_0.0625W_100PPM, "Resistor - 1%", Case=0402, Manufacturer=GENERIC, Manufacturer1 ComponentHeight=0.4mm, Manufacturer1 Example="YAGEO PHYCOMP", Manufacturer1 Part Number=232270676802L, Power=0.0625W, Tolerance=±1%, Author="CERN DEM JLC", Component Type=Standard, CreateDate=03.12.2007, HelpURL=\\cern.ch\dfs\Applications\Altium\Datasheets\R0402_Phycomp_RC0402.pdf, LatestRevisionDate=17.10.2012, Manufacturer Part Number=R0402_6K8_1%_0.0625W_100PPM, Mounted=Yes, Part Description="General Purpose Thick Film Chip Resistor", Part Number=R0402_6K8_1%_0.0625W_100PPM, Pin Count=2, PressFit=No, Sense=No, SMD=Yes, Socket=No, Status="Not Recommended", TC=±100ppm/°C
R387: library part R0402_220R_1%_0.0625W_100PPM, "Resistor - 1%", Case=0402, Manufacturer=GENERIC, Manufacturer1 ComponentHeight=0.4mm, Manufacturer1 Example="YAGEO PHYCOMP", Manufacturer1 Part Number=232270672201L, Power=0.0625W, Tolerance=±1%, Author="CERN DEM JLC", Component Type=Standard, CreateDate=03.12.2007, HelpURL=\\cern.ch\dfs\Applications\Altium\Datasheets\R0402_Phycomp_RC0402.pdf, LatestRevisionDate=17.10.2012, Manufacturer Part Number=R0402_220R_1%_0.0625W_100PPM, Mounted=Yes, Part Description="General Purpose Thick Film Chip Resistor", Part Number=R0402_220R_1%_0.0625W_100PPM, Pin Count=2, PressFit=No, Sense=No, SMD=Yes, Socket=No, Status="Not Recommended", TC=±100ppm/°C
RT1: library part THERM_NTC_10K_EPCOS_B57330V2103J260, "Thermistor NTC (Negative Temperature Coefficient)", Case=0603, Manufacturer=EPCOS, Manufacturer Part Number=B57330V2103J260, Power=180mW, Tolerance=±5%, Author="CERN DEM BC", ComponentHeight=0.9mm, Component Type=Standard, CreateDate=30.07.2015, HelpURL=\\cern.ch\dfs\Applications\Altium\Datasheets\THERM_EPCOS_B573xxV2.pdf, LatestRevisionDate=30.07.2015, Mounted=Yes, Part Description="SMD NTC Thermistor for Temperature Measurement", Part Number=THERM_NTC_10K_EPCOS_B57330V2103J260, Pin Count=2, Sense=No, SMD=Yes, Socket=No, Status=None
T10: "P-CHANNEL MOSFET WITH DIODE", Case=SOT23-3, Manufacturer="VISHAY SILICONIX", Author="CERN DEM JLC", Bonding=No, ComponentHeight=1.12mm, Component Type=Standard, CreateDate=02.05.2011, Device=Si2315BDS-T1-E3, HelpURL=\\cern.ch\dfs\Applications\Altium\Datasheets\Si2315BDS-T1-E3.pdf, LatestRevisionDate=02.05.2011, Manufacturer Part Number=Si2315BDS-T1-E3, Mounted=Yes, PackageDescription="SOT, 0.95mm, pitch; 3 pin,1.30mm W X 2.92mm L X 1.12mm H body, IPC Medium Density", Part Description="-12V -3A P-Channel STripFET® II Power MOSFET", Part Number=Si2315BDS-T1-E3, Pin Count=3, PressFit=No, Sense=No, SMD=Yes, Socket=No
T11: "45V, 100mA PNP General Purpose Double Transistor", Case=SOT666, Manufacturer="NXP SEMICONDUCTORS", Author="CERN DEM JLC", Bonding=No, ComponentHeight=0.6mm, Component Type=Standard, CreateDate=01.12.2011, Device=BC857BV, HelpURL=\\cern.ch\dfs\Applications\Altium\Datasheets\BC857BV.pdf, LatestRevisionDate=01.12.2011, Manufacturer Part Number=BC857BV, Mounted=Yes, PackageDescription="SOTFL (SOT666), 0.50mm, Pitch; 6 Pin, 1.20mm W X 1.60mm L X 0.60mm H Body, IPC Medium Density", Part Description="-45V -100mA PNP General Purpose Double Transistor", Part Number=BC857BV, Pin Count=6, PressFit=No, Sense=No, SMD=Yes, Socket=No
T12 T13 T18: "N-CHANNEL MOSFET WITH DIODE", Case=SOT23-3, Manufacturer="ON SEMICONDUCTOR", Author="CERN DEM JLC", Bonding=No, ComponentHeight=1.11mm, Component Type=Standard, CreateDate=23.03.2009, Device=BSS138LT1G, HelpURL=\\cern.ch\dfs\Applications\Altium\Datasheets\BSS138LT1G.pdf, LatestRevisionDate=23.03.2009, Manufacturer Part Number=BSS138LT1G, Mounted=Yes, PackageDescription="SOT23 3-Leads, Pitch 0.95mm - Body 1.4x3mm, IPC Medium Density", Part Description="50V 200mA N-Channel Enhancement Mode Field-Effect Transistor", Part Number=BSS138LT1G, Pin Count=3, PressFit=No, Sense=No, SMD=Yes, Socket=No
TP17 TP18 TP19 TP20: library part SMD_PAD_1.27X1.27MM, Author="CERN DEM JLC", ComponentHeight=0mm, Component Type="Standard (No BOM)", CreateDate=12.01.2008, Family="Test Point", HelpURL=Undefined, LatestRevisionDate=12.01.2008, Mounted=No, PackageDescription="1.27mm x 1.27mm PCB Copper Area (SMD Test Point)", Part Description="1.27mm x 1.27mm PCB Copper Area (SMD Test Point)", Part Number=SMD_PAD_1.27X1.27MM, Pin Count=1, Sense=No, SMD=Yes, Socket=No, Status=None

## Via types
v1: diameter 23.62, hole 11.81, Top to Bot, tented both sides, 64 vias
v2: diameter 31.5, hole 19.68, Top to Bot, tented both sides, 47 vias
v3: diameter 47.24, hole 31.5, Top to Bot, tented both sides, 6 vias

## Nets (pads, with @x,y where several pads share a name; then routed paths per layer and width w, separated by ;. In a path a pad name is that pad's centre, name@x,y a point inside that pad or via, vN(x,y) a via of type N, cw(c..) or ccw(c..) an arc to the next point about the centre after c; other vN are vias at no path point)
A\C\O\K\: IC56.25 LD19.1 R267.2 | length 1513.6
  Top w6: v1(1025,1195.01) v1(1085,1195.01) ; v1(1260,1197.93) v1(1320.87,1197.93) ; 1296.77,1703.32 v1(1296.77,1689.94) 1296.77,1593.81 1366.38,1524.2 1380.81,1524.2 v1(1395,1510.01)
  Bot w6: R267.2 848.1,989.27 864.98,972.39 937.38,972.39 956.69,991.71 LD19.1 1028.39,1120.01 v1@1028.39,1195.01 ; v1(1085,1195.01) 1087.91,1197.93 v1(1260,1197.93) ; IC56.25 1291.34,1683.68 1296.77,1689.11 v1(1296.77,1689.94) ; v1(1320.87,1197.93) 1402.66,1197.93 1411.38,1189.2 1432.22,1189.2 1444,1200.98 1444,1222.55 1415,1251.55 1415,1490.01 v1(1395,1510.01)
ADC_IN1: IC56.21 IC65.24 R191.1 | length 1456.1
  Bot w6: IC65.24 364.17,1951.41 346.2,1969.39 346.2,1981.21 360.81,1995.83 378.62,1995.83 384.43,1990.01 440.2,1990.01 450.25,2000.07 450.25,2005.27 468.25,2023.27 514.57,2023.27 526.98,2035.67 831.51,2035.67 864.98,2069.13 906.68,2069.13 940.14,2035.67 1009.55,2035.67 1009.55,1859.56 1000.25,1850.27 1000.25,1829.76 1014.75,1815.27 1035.25,1815.27 1087.81,1867.83 1150.3,1867.83 1199,1819.12 1199,1726.01 1204.19,1720.83 1217.22,1720.83 1226.64,1711.41 1226.64,1658.3 IC56.21
ADC_IN2: IC65.23 R208.1 R211.2 | length 501.9
  Bot w6: IC65.23 344.49,1944.12 334.2,1954.42 334.2,1969.77 328.05,1975.91 328.05,1985.85 350.03,2007.83 377.81,2007.83 407.34,2037.35 462.66,2037.35 464.75,2035.27 485.25,2035.27 551.18,2101.2 R211.2 R208.1
C\H\G\: IC56.26 LD18.1 R268.2 | length 844.9
  Top w6: v1(1205,1700.01) 1277.41,1700.01 1284.77,1707.37 1284.77,1708.29 1291.8,1715.32 1301.74,1715.32 1317.58,1699.48 1317.58,1671.68 v1(1332.68,1656.59)
  Bot w6: R268.2 749.66,1759.79 765.79,1759.79 771.38,1754.2 901.09,1754.2 936.17,1789.28 936.17,1815.2 LD18.1 989.15,1803.27 1040.22,1803.27 1092.78,1855.83 1113.62,1855.83 1170.92,1798.52 1170.92,1734.09 v1(1205,1700.01) ; IC56.26 v1(1332.68,1656.59)
GND: BATH4.1 C162.2 C163.2 C165.2 C166.2 C167.2 C168.2 C169.2 C170.2 C171.2 C172.2 C173.2 C174.1 C188.2 IC56.5 IC56.10 IC57.3 IC65.5 IC65.21 IC65.33 J66.9 J67.9 J90.6 LD24.1 PB3.1 R5.1 R83.2 R187.1 R188.1 R189.1 R191.2 R193.2 R194.1 R198.2 R200.2 R202.1 R211.1 R212.1 R216.1 T12.2 T13.2 T18.2 TP18.1 | length 4541.6
  Top w10: PB3.1 720.98,131 v2(780,190.01) ; v2@1053.68,1791.33 v2(1063.28,1791.33) ; v2(1245,1543.01) v2@1245,1550.01
  Bot w10: v2(120,1215.01) 121.57,1216.59 163.98,1216.59 130.51,1250.05 IC57.3 130.51,1354.5 v2(130,1355.01) ; IC65.5 285.43,1786.51 v2(295.28,1796.35) 305.12,1806.2 IC65.21 305.12,1945.96 C188.2 ; v2(290,1240.01) 293.9,1243.92 293.9,1283.51 ; J90.6 372.05,2207.77 v2(374.02,2209.74) ; TP18.1 492.13,1928.25 C174.1 562.02,1951.88 v2(563.97,1953.83) 610.24,1953.83 ; v2(510,2225.01) 513.22,2228.24 R211.1 ; C162.2 v2(710.63,2188.09) ; v2(745,640.01) 810,575.01 942.88,575.01 998.43,519.47 998.43,298.44 890,190.01 v2(780,190.01) ; v2(767.72,1993.2) LD24.1 ; R188.1@1002.76,2190.05 v2(1043.31,2190.05) 1046.83,2193.57 1116.17,2193.57 1120.87,2188.87 R187.1 ; R5.1 1062.05,832.97 v2(1065,830.01) ; v2(1030,1550.01) 1056.5,1550.01 R189.1 ; 1040,2433.68 1042.33,2436.01 1045,2438.68 ; v2(1063.28,1791.33) 1055.77,1791.33 1051.93,1795.17 1082.68,1795.17 1084.33,1793.52 R202.1@1100,1793.52 ; R194.1 1064.17,1694.19 v2(1065,1695.01) ; v2(1145,985.01) 1147.28,987.3 T18.2 ; v2(1145,1140.01) 1145.83,1140.84 T13.2 ; v2(1155,1400.01) 1157.28,1402.3 C170.2 ; R83.2 R191.2 1186.18,1888.52 v2(1194.84,1879.86) ; R198.2 1221.65,1906.67 v2(1194.84,1879.86) ; 1240,1353.52 1278.5,1353.52 v2(1280,1355.01) ; IC56.10 1244.09,1529.11 v2@1251.5,1536.51 ; v2(1245,1543.01) v2@1251.5,1536.51 ; R200.2 R193.2 v2(1194.84,1879.86) ; IC56.5 v2@1251.5,1536.51 ; R216.1 R212.1 1340.55,1086.9 T12.2 1369.17,1140.84 v2(1370,1140.01) ; v2(1335,1835.01) 1338.58,1831.43 C163.2 ; 1471.5,1590.01 v2(1515,1590.01) ; v2(1590,1255.01) 1568.9,1255.01 C165.2 C166.2 ; v2(1590,1395.01) 1589.76,1394.78 C167.2 ; v2(1595,1475.01) 1593.5,1473.52 C168.2 C167.2 ; v2(1600,1320.01) 1596.02,1316.04 C166.2 ; C166.2 C167.2
  Bot w30: J66.9 345.96,2413.38 BATH4.1@411.81,2347.53 ; BATH4.1@611.81,2347.53 697.96,2433.68 1040,2433.68 ; 1042.33,2436.01 1110.09,2436.01 1120.09,2446.01 1452.05,2446.01 1484.68,2413.38 J67.9
  other v2: 245,1750.01 340,1750.01 245,1845.01 345,1845.01
LED1: IC56.13 LD14.1 R271.2 | length 739.2
  Bot w6: R271.2 947.05,1127.06 956.69,1136.71 LD14.1 995.79,1205.8 1015,1225.01 1015,1351.98 1160.03,1497.01 1177.04,1497.01 1181.1,1501.08 1181.1,1523.72 IC56.13
LED2: IC56.14 LD15.1 R272.2 | length 606
  Bot w6: R272.2 939.53,1284.54 956.69,1301.71 LD15.1 1003.27,1363.28 1150,1510.01 1150,1540.01 1158.31,1548.32 IC56.14
LED3: IC56.15 LD16.1 R273.2 | length 546.1
  Bot w6: R273.2 925.2,1442.02 956.69,1473.52 LD16.1 972.44,1505.01 1115,1505.01 1138,1528.01 1138,1548.01 1154.05,1564.07 IC56.15
LED4: IC56.16 LD17.1 R274.2 | length 608.5
  Bot w6: R274.2 944.88,1599.5 956.69,1611.31 ; LD17.1 956.69,1611.31 ; IC56.16 1139.8,1579.82 1126,1566.01 1126,1536.16 1109.85,1520.01 1025,1520.01 1005.25,1539.76 1005.25,1549.76 956.69,1598.32 956.69,1611.31
MODE: R214.1 R216.2 R282.2 T13.1 | length 2913.1
  Top w6: v1(1490,980.01) v1(1545,980.01)
  Bot w6: R214.1 643.5,2233.52 668,2258.01 993.2,2258.01 995.2,2260.01 1038.37,2260.01 1056.18,2277.83 1405.09,2277.83 1690,1992.92 1690,1272.29 1610,1192.29 1610,1025.58 1573.62,989.2 1554.19,989.2 v1(1545,980.01) ; T13.1 1257.87,1086.9 R282.2 R216.2 1280.71,1040.72 1259.84,1019.86 1259.84,935.01 1302.48,892.38 1469.43,892.38 1490,912.95 v1(1490,980.01)
NetBATH2_1: BATH2.1 F3.2 R192.2 | length 646.5
  Bot w6: BATH2.1@568.5,536.51 568.5,673.12 R192.2
  Bot w50: BATH2.1@568.5,536.51 568.5,506.51 703.86,371.16 F3.2
NetBATH3_1: BATH3.1 F3.1 R82.2 | length 2688.9
  Bot w6: R82.2 685.47,734.54 757.52,662.49 F3.1
  Bot w50: F3.1 1321.57,662.49 1531.9,872.83 1537.81,872.83 1644,979.01 1644,1178.21 1730,1264.21 1730,2001 BATH3.1@1379.53,2351.47
NetC164_1: C164.1 IC56.4 L11.2 | length 399.5
  Top w10: v1(1375,1545.01) 1381.85,1545.01 1455,1618.16 v1(1455,1650.01)
  Bot w10: IC56.4 1365,1558.16 1375,1548.16 v1(1375,1545.01) 1372.19,1542.2 1372.19,1473.53 1380,1465.72 C164.1 ; v1(1455,1650.01) 1455.67,1650.68 1515.75,1650.68 L11.2
NetC164_2: C164.2 IC56.6 | length 65.1
  Bot w10: IC56.6 1311.02,1459.28 1320.87,1449.44 C164.2
NetC170_1: C170.1 IC56.11 | length 81.2
  Bot w6: C170.1 1228.35,1476.08 IC56.11
NetC171_1: C171.1 IC56.9 R206.2 | length 2006.6
  Top w6: v1(350,1395.01) 415,1395.01 v1(420,1400.01)
  Bot w6: R206.2 336.93,1395.01 v1(350,1395.01) ; v1(420,1400.01) 420,1200.01 700.75,919.27 700.75,844.61 771.15,774.2 793.62,774.2 804.43,785.01 1071.97,785.01 1101.75,814.79 1101.75,845.24 1064.19,882.79 1064.19,1239.35 1240,1415.16 1240,1416.51 1259.84,1436.35 IC56.9
NetC172_1: C172.1 IC57.1 R206.1 | length 142.7
  Bot w6: IC57.1 288,1352.41 293.9,1346.51 293.9,1412.25 R206.1@292.72,1413.44
NetC188_1: C188.1 IC65.20 | length 64.3
  Bot w6: C188.1 285.43,1945.96 IC65.20
NetC212_1: C212.1 IC56.7 PB3.2 R205.1 T12.3 | length 1971.1
  Top w10: v1(1060,200.01) 1072.83,187.18 PB3.2 ; v1(1420,1210.01) 1426.61,1210.01 1431.61,1205.01 1438.31,1211.71 1476.81,1173.2 v1(1476.81,1129.67) ; v1(1455,915.01) 1540,830.01 v1(1550,830.01)
  Bot w10: v1(1060,200.01) 1033.55,226.47 1033.55,563.56 1090,620.01 1330,620.01 1540,830.01 v1(1550,830.01) ; IC56.7 1291.34,1428.68 1376.77,1343.24 R205.1 1376.77,1232.57 1414.17,1232.57 1430,1216.75 1423.27,1210.01 v1(1420,1210.01) ; v1(1476.81,1129.67) 1476.81,1018.2 1480,1015.01 1437.01,972.02 1437.01,933.01 v1(1455,915.01) ; v1(1455,915.01) 1463.63,906.38 v1(1455,915.01)
NetC212_2: C212.2 R300.1 T18.3 | length 152.3
  Bot w6: T18.3 1354.33,949.9 1374.02,969.58 1374.02,1018.01 R300.1@1384.65,1028.64
NetIC56_2: IC56.2 L11.1 | length 357.5
  Bot w10: IC56.2 1356.46,1601.47 1515.75,1760.76 L11.1
NetIC56_8: IC56.8 R204.1 T13.3 | length 342.1
  Bot w6: T13.3 1221.65,1232.57 R204.1 1221.65,1301.67 1235,1315.01 1275,1315.01 1304.75,1344.76 1304.75,1365.27 1275.59,1394.42 IC56.8
NetIC56_12: IC56.12 R82.1 R192.1 | length 1268.5
  Top w6: v1(710,755.01) 745,755.01 v1(785,795.01)
  Bot w6: R192.1 R82.1 693.46,771.55 v1(710,755.01) ; v1(785,795.01) 787,797.01 1067,797.01 1089.75,819.76 1089.75,840.27 1045,885.01 1045,1185.58 1045.81,1186.39 1045.81,1203.63 1045,1204.45 1045,1333.04 1191.38,1479.42 1199.41,1479.42 1208.66,1488.68 IC56.12
NetIC56_17: IC56.17 R186.1 R189.2 | length 130.3
  Bot w6: R189.2 R186.1 ; R186.1@1101.18,1579.82 1116.93,1595.57 IC56.17
NetIC56_18: IC56.18 R190.1 R194.2 | length 137.6
  Bot w6: R194.2 1101.18,1617.69 R190.1 1102.2,1611.31 IC56.18
NetIC56_19: IC56.19 R196.1 R201.1 R203.1 R207.1 R210.1 R213.1 R387.2 | length 1737.2
  Top w6: v1(675,1095.01) v1(675,1140.01) ; v1(680,1425.01) v1(680,1475.01) ; v1(680,1575.01) v1(680,1620.01) ; v1(685,1260.01) v1(685,1310.01) ; v1(780,1730.01) v1(780,1775.01) 810,1775.01 830,1755.01 950,1755.01 v1(955,1750.01)
  Bot w6: v1(675,1095.01) 675,1080.01 688.19,1066.83 R213.1 ; v1(675,1140.01) 675,1165.01 708.66,1198.68 708.66,1225.49 ; v1(680,1425.01) 680,1411.63 708.66,1382.97 ; v1(680,1475.01) 680,1511.79 708.66,1540.45 ; v1(680,1575.01) 680,1569.11 708.66,1540.45 ; v1(680,1620.01) 687.44,1620.01 727.17,1659.74 ; v1(685,1260.01) 685,1249.15 708.66,1225.49 ; v1(685,1310.01) 685,1359.31 708.66,1382.97 ; R196.1@746.85,1225.49 708.66,1225.49 ; R201.1 746.85,1382.97 708.66,1382.97 ; R203.1 746.85,1540.45 708.66,1540.45 ; R207.1 727.17,1659.74 ; R210.1 720.17,1854.23 719.73,1853.79 719.73,1820.28 726.83,1813.19 726.83,1802.07 732.1,1796.8 758.21,1796.8 v1(780,1775.01) ; v1(780,1730.01) 730,1730.01 708.89,1708.9 708.89,1676.13 725.28,1659.74 727.17,1659.74 ; v1(955,1750.01) 1046.07,1750.01 1086.09,1710 ; R387.2 1086.5,1710 1086.09,1710 ; IC56.19 1127.94,1627.06 1121.6,1633.4 1121.6,1674.49 1086.09,1710
NetIC56_20: IC56.20 R195.2 R202.2 RT1.2 | length 1398.2
  Top w6: v1(1005,2400.01) v1(1005,2470.01) ; v1(1018.2,2307.64) 1018.2,2236.81 1030.01,2225 v1(1035,2225) ; v1(1105,1835.01) v1(1105,1890.01) ; v1(1160,2030.01) v1(1160,2080.01)
  Bot w6: v1(1005,2400.01) 1005,2320.01 1017.38,2307.64 v1(1018.2,2307.64) ; v1@1010,2460.01 1019.19,2469.2 1019.19,2495.09 1034.1,2510 1262.73,2510 RT1.2 ; v1(1035,2225) 1035,2225.58 1040,2230.58 1056.38,2214.2 1115.33,2214.2 1160,2169.54 v1(1160,2080.01) ; R202.2@1100,1756.51 1126.5,1756.51 ; v1(1105,1835.01) 1135,1805.01 1135,1765.01 1126.5,1756.51 ; v1(1105,1890.01) 1105,1975.01 v1(1160,2030.01) ; R195.2@1145,1656.5 R195.2@1161.5,1656.5 ; R195.2@1161.5,1656.59 IC56.20 1208.66,1666.34 1158.92,1716.08 1158.92,1746.09 1148.5,1756.51 1126.5,1756.51
NetIC56_22: IC56.22 R193.1 | length 170.4
  Bot w6: R193.1 1220.47,1734.54 1238.64,1716.38 1238.64,1703.65 1244.09,1698.19 IC56.22
NetIC56_23: IC56.23 R199.1 | length 62.2
  Bot w6: IC56.23 R199.1
NetIC56_24: IC56.24 R197.1 | length 209.8
  Bot w6: IC56.24 1275.59,1698.19 1281.05,1703.65 1281.05,1711.4 1299.21,1729.56 R197.1
NetIC65_1: IC65.1 R268.1 | length 526.6
  Bot w6: IC65.1 364.17,1676.63 367.17,1673.63 367.17,1626.04 394.83,1598.38 579.49,1598.38 669.19,1688.08 669.19,1723.63 683.98,1738.42 709.84,1738.42 R268.1
NetIC65_2: IC65.2 R274.1 | length 553.7
  Bot w6: IC65.2 344.49,1672.85 345,1672.34 345,1590.01 435,1500.01 560,1500.01 659.49,1599.5 671.08,1599.5 671.38,1599.2 709.54,1599.2 R274.1
NetIC65_3: IC65.3 R273.1 | length 565.1
  Bot w6: IC65.3 324.8,1665.21 325,1665.01 325,1580.01 462.99,1442.02 667.58,1442.02 671.38,1445.83 706.04,1445.83 R273.1
NetIC65_6: IC65.6 R272.1 | length 703.9
  Bot w6: IC65.6 265.75,1665.76 245.25,1645.27 245.25,1604.76 259.75,1590.27 291.63,1590.27 430,1451.9 430,1450.01 435.19,1444.83 438.56,1444.83 464.81,1418.58 464.81,1415.2 595.47,1284.54 R272.1
NetIC65_7: IC65.7 R271.1 | length 840.7
  Bot w6: IC65.7 246.06,1666.08 233.25,1653.27 233.25,1599.79 254.78,1578.27 286.66,1578.27 418,1446.93 418,1442.01 427.19,1432.83 433.59,1432.83 452.81,1413.6 452.81,1407.2 555,1305.01 555,1220.01 655.81,1119.2 683.62,1119.2 691.48,1127.06 R271.1
NetIC65_8: IC65.8 R267.1 | length 947.5
  Bot w6: IC65.8 226.38,1671.39 221.25,1666.27 221.25,1594.82 249.81,1566.27 281.69,1566.27 406,1441.96 406,1434.01 419.19,1420.83 428.62,1420.83 440.81,1408.63 440.81,1399.2 540,1300.01 540,1111.56 662.29,989.27 R267.1
NetIC65_13: IC65.13 R307.1 | length 1908.4
  Top w6: v1(1107,742.01) 1107,793.01 v1(1110,790.01)
  Bot w6: IC65.13 136.18,1806.2 136.18,1675.8 196.75,1615.24 196.75,1585.39 239.87,1542.27 271.75,1542.27 382,1432.01 382,1409.42 382.81,1408.6 382.81,1381.42 382,1380.61 382,1194.07 654.31,921.76 655.22,921.76 676.75,900.24 676.75,834.67 769.4,742.01 v1(1107,742.01) ; R307.1 1113.75,880.64 1113.75,793.76 v1(1110,790.01)
NetIC65_14: IC65.14 R282.1 | length 2314.1
  Top w10: v1(1235,730.01) v1(1235,800.01)
  Bot w6: IC65.14 125.87,1825.88 120,1820.01 120,1675.01 184.75,1610.27 184.75,1580.41 234.9,1530.27 239.75,1530.27 275,1495.01 302.03,1495.01 370,1427.04 370,1404.45 370.81,1403.63 370.81,1386.39 370,1385.58 370,1180.01 640.25,909.76 650.25,909.76 664.75,895.27 664.75,825.27 675,815.01 679.43,815.01 773.24,721.2 1115.62,721.2 1124.43,730.01 v1(1235,730.01)
  Bot w10: R282.1 1201.97,1028.05 1231.97,1028.05 1236.22,1023.79 1236.22,801.23 v1(1235,800.01)
NetIC65_32: IC65.32 R269.1 | length 110.4
  Bot w6: IC65.32 460.63,1658.56 R269.1
NetJ66_3: J66.3 J67.3 | length 1555.4
  Top w6: J66.3 205.89,2492.12 205.89,2493.95 255.91,2493.95 255.31,2494.54 v1(255.31,2524.7) ; v1(1516.34,2524.7) 1516.34,2505.6 1515.75,2505.01 1528.64,2492.12 J67.3
  Bot w6: v1(255.31,2524.7) 273.13,2524.7 316.81,2568.38 455.01,2568.38 458.07,2565.32 526.18,2565.32 530.12,2569.26 1451.5,2569.26 1496.06,2524.7 v1(1516.34,2524.7)